# Altium PCB PCB1.PcbDoc
Units mil, origin at the board's own origin, x right, y up, seen from the top; angles counter-clockwise.
Board outline 6000 x 4000 mil, 2 copper layers (Top Layer, Bottom Layer); 9 components, 8 nets, 33 pads, 3 vias.
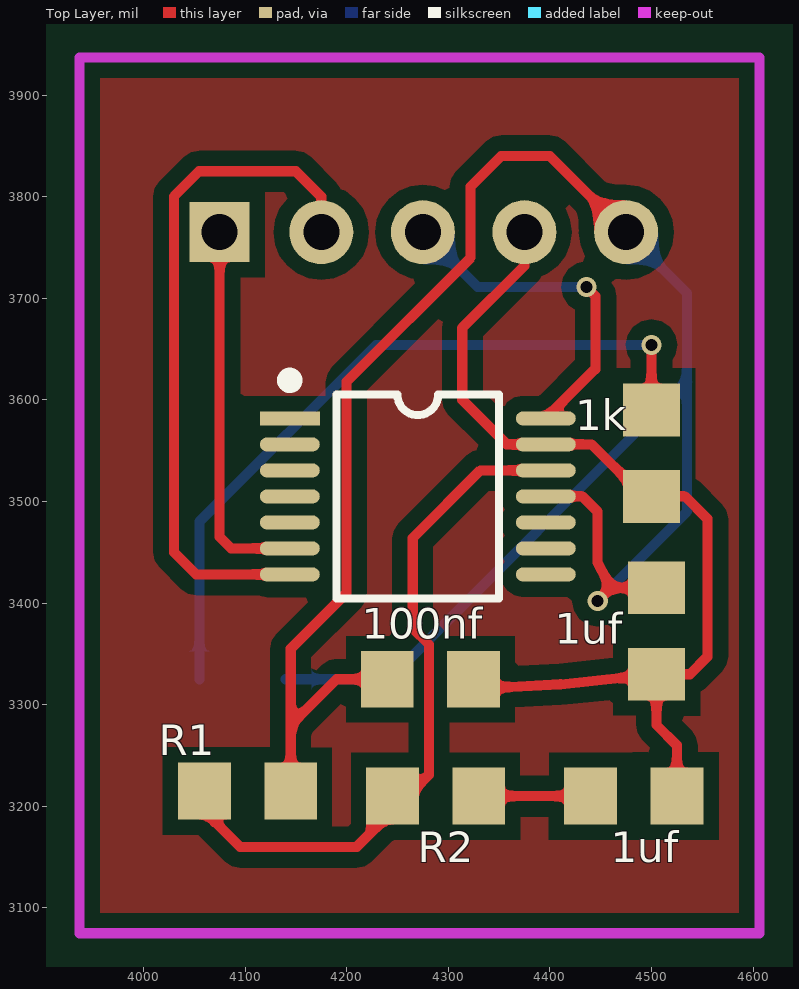
[diagram p0: Top Layer view]
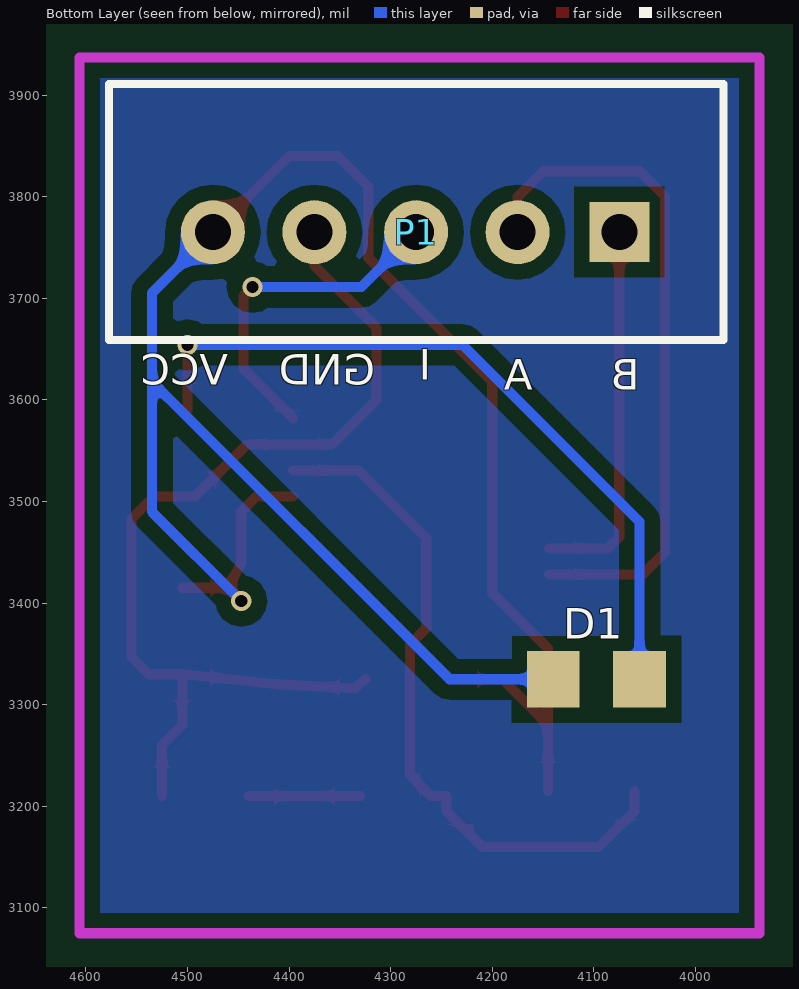
[diagram p1: Bottom Layer view, seen from below]

## Layer stack, top to bottom
Top Solder: solder mask 0.4, Solder Resist, Dk 3.5
Top Layer: signal copper 1.4
Dielectric1: dielectric 12.6, FR-4, Dk 4.8
Bottom Layer: signal copper 1.4
Bottom Solder: solder mask 0.4, Solder Resist, Dk 3.5

## Board outline
2580,2130 2580,6130 8580,6130 8580,2130

## Design rules (kind name [scope] priority, off if disabled: settings)
AssemblyTestPointUsage AssemblyTestPointUsage_1 [All] p2:
AssemblyTestpoint AssemblyTestpoint_1 [All] p2: testpointundercomponent=TRUE minsize=40 maxsize=100 preferedsize=60 minholesize=0 maxholesize=40 preferedholesize=32 testpointgrid=1 usegrid=TRUE gridtolerance=0.01 allowsidetop=TRUE allowsidebottom=TRUE
Clearance Clearance_1 [InPolygon] p1: gap=15
Clearance [All] p2: gap=10
ComponentClearance ComponentClearance_1 [All] p2: gap=10 collisioncheckmode=3 verticalgap=10 showdistances=FALSE
DiffPairsRouting DiffPairsRouting_1 [All] p2: maxlimit=10 minlimit=10 mostfreqgap=10 toplayer_minwidth=15 toplayer_maxwidth=15 toplayer_prefwidth=15 bottomlayer_minwidth=15 bottomlayer_maxwidth=15 bottomlayer_prefwidth=15 maxuncoupledlength=500
FabricationTestPointUsage TestPointUsage [All] p2: valid=0 allowmultiple=FALSE
FabricationTestpoint Testpoint [All] p2: side=3 testpointundercomponent=TRUE minsize=40 maxsize=100 preferedsize=60 minholesize=0 maxholesize=40 preferedholesize=32 testpointgrid=1 allowsidetop=TRUE allowsidebottom=TRUE usegrid=TRUE gridtolerance=0.01
FanoutControl Fanout_LCC [IsLCC] p1: bgadir=Out bgaviamode=Centered fanoutstyle=Auto fanoutdirection=Alternating viagrid=1 // Fanout_LCC (Default Rule)
FanoutControl Fanout_BGA [IsBGA] p2: bgadir=Out bgaviamode=Centered fanoutstyle=Auto fanoutdirection=Alternating viagrid=1 // Fanout_BGA (Default Rule)
FanoutControl Fanout_Default [All] p4: bgadir=Out bgaviamode=Centered fanoutstyle=Auto fanoutdirection=Alternating viagrid=1 // Fanout_Default (Default Rule)
FanoutControl Fanout_Small [(CompPinCount < 5)] p5: bgadir=Out bgaviamode=Centered fanoutstyle=Auto fanoutdirection=OutThenIn viagrid=1 // Fanout_Small (Default Rule)
FanoutControl Fanout_BGA_1 [IsBGA] p6: bgadir=Out bgaviamode=Centered fanoutstyle=Auto fanoutdirection=Alternating viagrid=1 // Fanout_BGA (Default Rule)
FanoutControl Fanout_LCC_1 [IsLCC] p7: bgadir=Out bgaviamode=Centered fanoutstyle=Auto fanoutdirection=Alternating viagrid=1 // Fanout_LCC (Default Rule)
FanoutControl Fanout_SOIC_1 [IsSOIC] p8: bgadir=Out bgaviamode=Centered fanoutstyle=Auto fanoutdirection=Alternating viagrid=1 // Fanout_SOIC (Default Rule)
FanoutControl Fanout_Small_1 [(CompPinCount < 5)] p9: bgadir=Out bgaviamode=Centered fanoutstyle=Auto fanoutdirection=OutThenIn viagrid=1 // Fanout_Small (Default Rule)
FanoutControl Fanout_Default_1 [All] p10: bgadir=Out bgaviamode=Centered fanoutstyle=Auto fanoutdirection=Alternating viagrid=1 // Fanout_Default (Default Rule)
Height Height_1 [All] p2: minheight=0 maxheight=1000 prefheight=500
HoleSize HoleSize_1 [All] p2: absolutevalues=TRUE maxlimit=100 minlimit=1 maxpercent=80.000 minpercent=20.000
HoleToHoleClearance HoleToHoleClearance_1 [All] p2: gap=10 allowstackedmicrovias=TRUE
LayerPairs LayerPairs_1 [All] p2: enforce=TRUE
MinimumSolderMaskSliver MinimumSolderMaskSliver_1 [All] p2: minsoldermaskwidth=10
NetAntennae NetAntennae_1 [All] p2: netantennaetolerance=0
PasteMaskExpansion PasteMaskExpansion_1 [All] p2: expansion=0
PlaneClearance PlaneClearance_1 [All] p2: clearance=20
PolygonConnect [All] p1: connectstyle=Relief reliefconductorwidth=10 reliefentries=4 polygonreliefangle="90 Angle" airgapwidth=10
PolygonConnect PolygonConnect_1 [All] p2: connectstyle=Relief reliefconductorwidth=10 reliefentries=4 polygonreliefangle="90 Angle" airgapwidth=10
RoutingPriority RoutingPriority_1 [All] p2: routingpriority=0
RoutingTopology RoutingTopology_1 [All] p2: topology=Shortest
RoutingVias [All] p1: holewidth=25 width=40 viastyle="Through Hole" minholewidth=28 minwidth=50 maxholewidth=28 maxwidth=50
ShortCircuit ShortCircuit_1 [All] p2: allowed=FALSE
SilkToBoardRegionClearance SilkToBoardRegionClearance_1 [All] p2:
SilkToSilkClearance SilkToSilkClearance_1 [All] p2: silktosilkclearance=10
SilkToSolderMaskClearance SilkscreenOverComponentPads [IsPad] p2: minsilkscreentomaskgap=10 clearancetoexposedcopper=TRUE
SolderMaskExpansion [All] p1: expansion=4
SolderMaskExpansion SolderMaskExpansion_1 [All] p2: expansion=4
UnRoutedNet UnRoutedNet_1 [All] p2:
UnpouredPolygon UnpouredPolygon_1 [All] p2:
Width [All] p1: maxlimit=10 minlimit=10 preferedwidth=10
26 further rules are at their usual default settings.

## Classes and differential pairs
component class оƬ: 1k 1uf 100nf D1 R1 R2

## Components (designator, comment, footprint, x,y, rotation, side; value= is the part's Value field where it differs from the comment)
1k "Res1" 0805 4560,3295 r90 top (schematic designator R3)
1uf "Cap" 0805 4735,3270 r180 top (schematic designator C2)
1uf "Cap" 0805 4565,3120 r90 top (schematic designator C3)
100nf "Cap" 0805 4030,3265 r0 top (schematic designator C1)
D1 "LED0" 0805 4350,3265 r180 bottom
P1 "Header 5H" 5pin_XH2.54 4015,3575 r90 bottom
R1 "Res2" 0805 3850,3155 r0 top
R2 "Res2" 0805 4035,3150 r0 top
U1 "MHDR2X7" SSOP14 4270,3505 r0 top

## Footprints (in the part's own frame and the unit in brackets; to place one, negate y for a bottom-side part, rotate by r counter-clockwise, add the part's x,y. Pads: shape width x height; smd on the part's side, far side on the other; paste and mask are expansions set on the pad)
5pin_XH2.54 [mm]
  rect 1.5x1.5 hole 0.9: 1(4.826,1.524)
  round 1.6 hole 0.9: 2(4.826,4.064) 3(4.826,6.604) 4(4.826,9.144) 5(4.826,11.684)
  silkscreen extent 2.13,-1.08 8.53,14.28
0805 [mil]
  rect 52x56 smd: 1(210,60) 2(295,60)
SSOP14 [mm] "5*6.4*1.2mm（蒜米工坊）"
  rect 1.5x0.35 smd: 1(-3.2,1.95)
  oval 1.5x0.35 smd: 2(-3.2,1.3) 3(-3.2,0.65) 4(-3.2,0) 5(-3.2,-0.65) 6(-3.2,-1.3) 7(-3.2,-1.95) 8(3.2,-1.95) 9(3.2,-1.3) 10(3.2,-0.65) 11(3.2,0) 12(3.2,0.65) 13(3.2,1.3) 14(3.2,1.95)
  silkscreen extent -3.33,-2.55 2.03,3.03, body extent -3.2,-2.5 3.2,2.5, height 1.25

## Part data
1k R1 R2: "Resistor"
1uf 1uf 100nf: "Capacitor"
D1: "Typical INFRARED GaAs LED"
P1: "Header, 5-Pin, Right Angle"
U1: "Header, 7-Pin, Dual row"

## Via types
v1: diameter 20, hole 12, Top Layer to Bottom Layer, 3 vias

## Nets (pads, with @x,y where several pads share a name; then routed paths per layer and width w, separated by ;. In a path a pad name is that pad's centre, name@x,y a point inside that pad or via, vN(x,y) a via of type N, cw(c..) or ccw(c..) an arc to the next point about the centre after c; other vN are vias at no path point)
3.3V/5V: 1uf.2@4505,3415 100nf.1 D1.1 P1.5 R1.2 U1.11 | length 2117.9
  Top Layer w10: R1.2 4145,3280 ; 100nf.1 4190,3325 4145,3280 ; U1.11 4432,3505 4447,3490 4447,3440 4460,3415 ; v1(4447,3402) 4460,3415 ; P1.5 4400,3840 4352,3840 4322,3810 4322,3740 4200,3618 4200,3410 4145,3355 4145,3280 ; 1uf.2@4505,3415 4460,3415
  Bottom Layer w10: D1.1 4242,3325 4535,3618 ; v1(4447,3402) 4535,3490 4535,3618 ; P1.5 4535,3705 4535,3618
A: P1.2 U1.7 | length 673.9
  Top Layer w10: U1.7 4051.77,3428.23 4030,3450 4030,3800.27 4054.73,3825 4150,3825 4175,3800 P1.2
B: P1.1 U1.6 | length 373.6
  Top Layer w10: P1.1 4075,3465 4086.18,3453.82 U1.6
GND: 1k.1 1uf.1 100nf.2 P1.4 U1.13 | length 985.4
  Top Layer w10: 100nf.2 4334.94,3316.05 4410.52,3320.03 1uf.1@4505,3330 ; P1.4 4375,3732.01 4313.82,3670.83 4313.82,3600 4357.64,3556.18 U1.13 4441,3556.18 4492.18,3505 1k.1 4533,3505 4555,3483 4555,3347 4538,3330 1uf.1@4505,3330 ; 1uf.1@4525,3210 4525,3260 4505,3280 1uf.1@4505,3330
I/PWM: P1.3 U1.14 | length 337.1
  Top Layer w10: U1.14 4444.21,3630 4445,3630 4445,3702 v1(4436,3711)
  Bottom Layer w10: P1.3 4329,3711 v1(4436,3711)
NetC2_2: 1uf.2@4440,3210 R2.2 | length 110
  Top Layer w10: R2.2 1uf.2@4440,3210
NetD1_2: 1k.2 D1.2 | length 736.1
  Top Layer w10: 1k.2 v1(4500,3654)
  Bottom Layer w10: D1.2 4055,3480 4229,3654 v1(4500,3654)
VDD3V: R1.1 R2.1 U1.12 | length 691.9
  Top Layer w10: R1.1 4060,3195 4095,3160 4210,3160 4245,3195 R2.1 4260,3210 4281,3231 4281,3359.21 4265,3375.21 4265,3464 4331.59,3530.59 U1.12
pads on no net: U1.1 U1.2 U1.3 U1.4 U1.5 U1.8 U1.9 U1.10

## Polygon pours and split planes (outlines as drawn)
no net on Top Layer "Top Layer-No Net" (solid, pour order 18): 3937.01,3937.01 4606.3,3937.01 4606.3,3075 3937.01,3075 3937.01,3937.01
no net on Bottom Layer "Top Layer-No Net" (solid, pour order 20): 3937.01,3937.01 4606.3,3937.01 4606.3,3075 3937.01,3075 3937.01,3937.01

## Keep-outs
Keep-Out Layer:
  lines w10: 3937.01,3075 4606.3,3075 4606.3,3937.01 3937.01,3937.01 3937.01,3075

## Silkscreen, mask and mechanical layers (free items; w line width, h text height)
Bottom Overlay:
  text "I" at 4260,3620 h30
  text "GND" at 4315,3615 h30
  text "VCC" at 4460,3615 h30
  text "B" at 4055,3610 h30
  text "A" at 4160,3610 h30
Mechanical 16:
  drawing of 1874 lines, arcs and shapes, not listed
  text "1" at 1427,7465 h70
  text "2" at 4287,7465 h70
  text "3" at 7167,7465 h70
  text "4" at 10037,7465 h70
  text "A" at 75,6559 h70
  text "A" at 11375,6559 h70
  text "B" at 75,4667 h70
  text "B" at 11375,4667 h70
  text "C" at 75,2757 h70
  text "C" at 11375,2757 h70
  text "ENGINEER:" at 6850,1300 h45
  text "TITLE:" at 8350,1300 h45
  text "PCB DESIGNER:" at 6850,1005 h45
  text "D" at 75,867 h70
  text "D" at 11375,867 h70
  text "DATE:" at 6850,700 h45
  text "PART NO.:" at 8350,700 h45
  text "REV:" at 10450,700 h45
  text "Altium Limited" at 5550,600 h70
  text ".PRINT_DATE" at 6900,580 h70
  text "12a Rodborough Rd" at 5550,500 h70
  text "Frenchs Forest" at 5550,400 h70
  text "FILE NAME:" at 6850,400 h45
  text "DWG NO:" at 8350,400 h45
  text "SCALE:" at 10450,400 h45
  text "NSW 2086" at 5550,300 h70
  text ".PCB_FILE_NAME_NO_PATH" at 6900,280 h70
  text "1" at 1427,65 h70
  text "2" at 4287,65 h70
  text "3" at 7167,65 h70
  text "4" at 10037,65 h70